# Altium PCB PCB2.PcbDoc
Units mm, origin at the board's own origin, x right, y up, seen from the top; angles counter-clockwise.
Board outline 15 x 55 mm, 2 copper layers (Top Layer, Bottom Layer); 1 components, 4 nets, 4 pads, 8 vias.
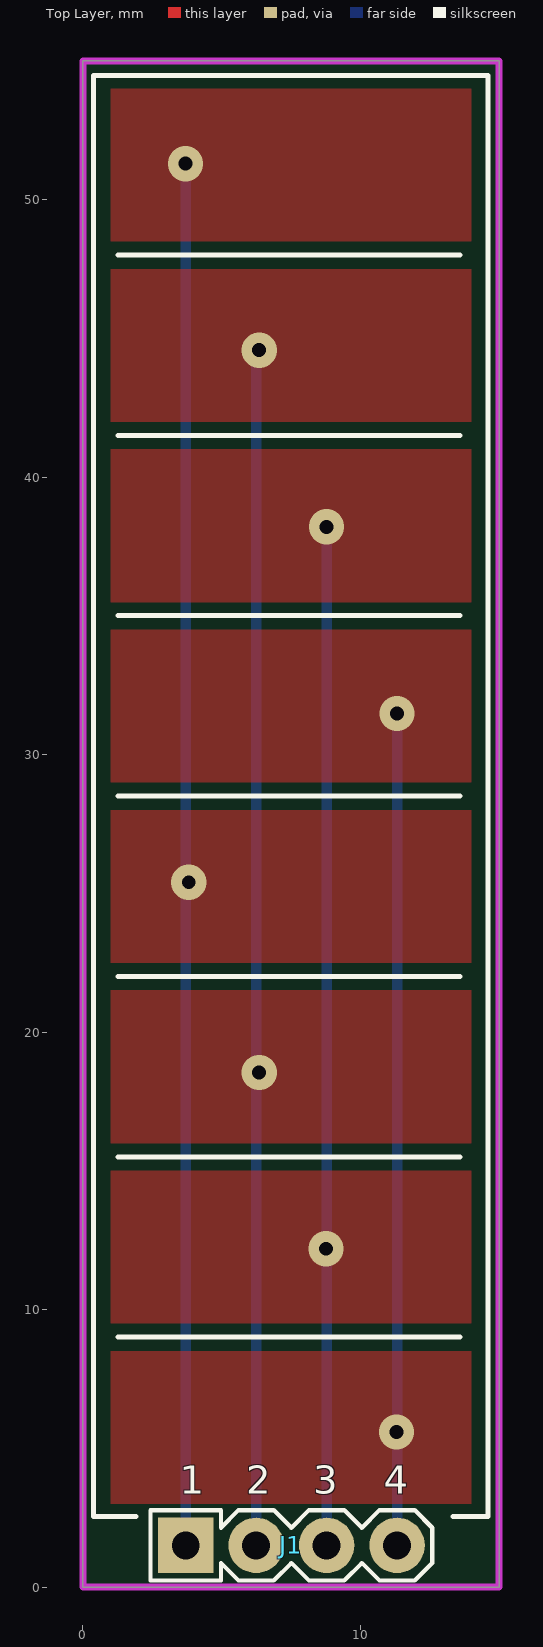
[diagram p0: Top Layer view]
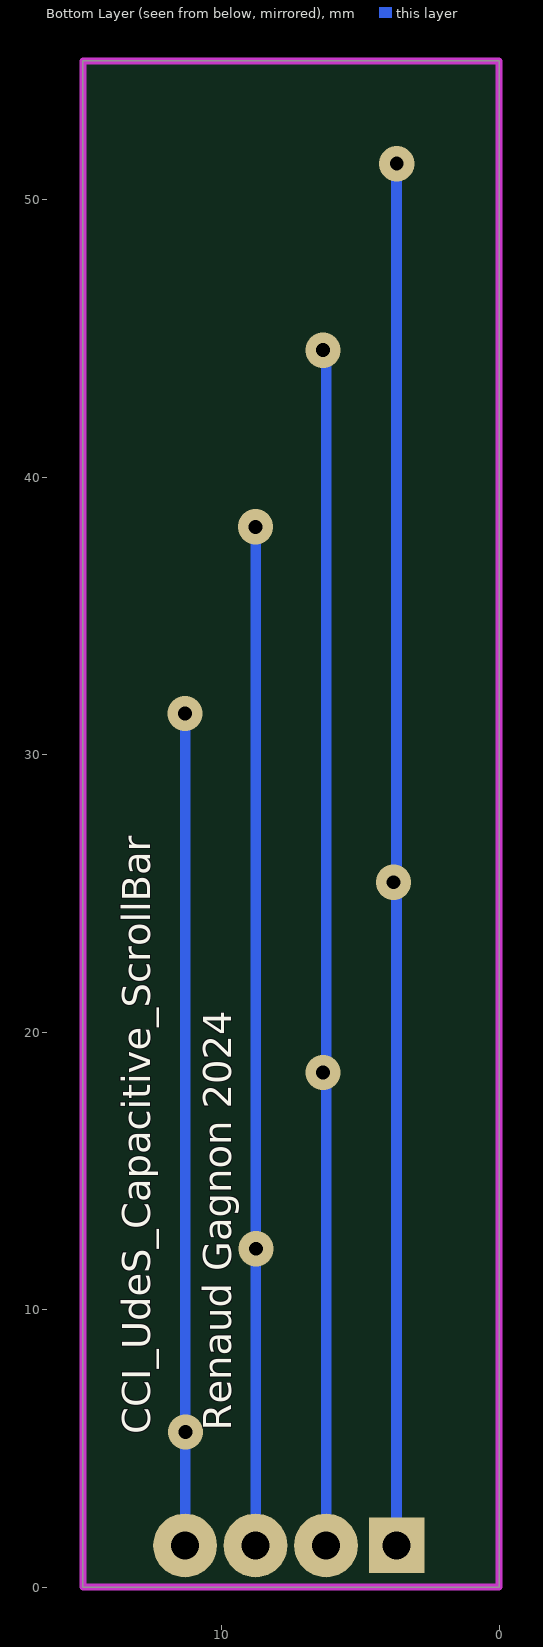
[diagram p1: Bottom Layer view, seen from below]

## Layer stack, top to bottom
Top Solder: solder mask 0.0102, Solder Resist, Dk 3.5
Top Layer: signal copper 0.0356
Dielectric 1: dielectric 0.32, FR-4, Dk 4.8
Bottom Layer: signal copper 0.0356
Bottom Solder: solder mask 0.0102, Solder Resist, Dk 3.5

## Board outline
0,0 0,55 15,55 15,0

## Design rules (kind name [scope] priority, off if disabled: settings)
Clearance Clearance_23P [InNet('USB2D_P') vs InNet('USBD_P')] p1: gap=0 ignorepadtopadclearanceinfootprint=FALSE
Clearance Clearance_13P [InNet('USBD_P') vs InNet('USB1D_P')] p2: gap=0 ignorepadtopadclearanceinfootprint=FALSE
Clearance Clearance_23N [InNet('USB2D_N') vs InNet('USBD_N')] p3: gap=0 ignorepadtopadclearanceinfootprint=FALSE
Clearance Clearance_13N [InNet('USB1D_N') vs InNet('USBD_N')] p4: gap=0 ignorepadtopadclearanceinfootprint=FALSE
Clearance Clearance_12P [InNet('USB1D_P') vs InNet('USB2D_P')] p5: gap=0 ignorepadtopadclearanceinfootprint=FALSE
Clearance Clearance_12N [InNet('USB1D_N') vs InNet('USB2D_N')] p6: gap=0 ignorepadtopadclearanceinfootprint=FALSE
Clearance [All] p7: gap=0.254 ignorepadtopadclearanceinfootprint=FALSE except(0: Arc-Hole Track-Hole SMDPad-Hole THPad-Hole Via-Hole Fill-Hole Poly-Hole Region-Hole Text-Hole; 0.2: Arc-Arc Arc-Track Arc-SMDPad Arc-THPad Arc-Via Track-Track Track-SMDPad Track-THPad Track-Via SMDPad-SMDPad THPad-THPad)
ComponentClearance [All] p1: gap=0.1 collisioncheckmode=3 verticalgap=0.254 showdistances=FALSE
DiffPairsRouting DiffPair_DiffPairsRouting [InDifferentialPair ('USBD')] p1: maxlimit=0.254 minlimit=0.2 mostfreqgap=0.254 toplayer_minwidth=0.2 toplayer_maxwidth=0.381 toplayer_prefwidth=0.254 bottomlayer_minwidth=0.2 bottomlayer_maxwidth=0.381 bottomlayer_prefwidth=0.254 maxuncoupledlength=12.7
DiffPairsRouting [All] p2: maxlimit=0.254 minlimit=0.2 mostfreqgap=0.254 toplayer_minwidth=0.2 toplayer_maxwidth=0.381 toplayer_prefwidth=0.254 bottomlayer_minwidth=0.2 bottomlayer_maxwidth=0.381 bottomlayer_prefwidth=0.254 maxuncoupledlength=12.7
HoleSize [All] p1: absolutevalues=TRUE maxlimit=5.08 minlimit=0.3 maxpercent=80.000 minpercent=20.000
MatchedLengths DiffPair_MatchedLengths [InDifferentialPair ('USBD')] p1: tolerance=25.4 checknetsindiffpair=FALSE checkdiffpairvsdiffpair=TRUE checkxsignals=TRUE checkothers=TRUE
MinimumSolderMaskSliver [All] p1: minsoldermaskwidth=0.127
PasteMaskExpansion PasteMaskExpansion_1 [All] p1: expansion=0
PolygonConnect [All] p1: thpad.connectstyle=Relief thpad.reliefconductorwidth=0.254 thpad.reliefentries=4 thpad.polygonreliefangle="90 Angle" thpad.airgapwidth=0.254 smdpad.connectstyle=Relief smdpad.reliefconductorwidth=0.254 smdpad.reliefentries=4 smdpad.polygonreliefangle="90 Angle" smdpad.airgapwidth=0.254 via.connectstyle=Direct via.reliefconductorwidth=0.254 via.reliefentries=4 via.polygonreliefangle="90 Angle" via.airgapwidth=0.254
RoutingVias [All] p1: holewidth=0.711 width=1.27 viastyle="Through Hole" minholewidth=0.3 minwidth=0.5 maxholewidth=0.711 maxwidth=1.27
ShortCircuit ShortCircuit_USBP [InNetClass('USBP') vs InNetClass('USBP')] p1: allowed=TRUE
ShortCircuit ShortCircuit_USBN [InNetClass('USBN') vs InNetClass('USBN')] p2: allowed=TRUE
ShortCircuit [All] p3: allowed=FALSE
SilkToSolderMaskClearance [IsPad] p1: minsilkscreentomaskgap=0 clearancetoexposedcopper=TRUE
SolderMaskExpansion [IsVia] p1: expansion=0.102 istentingtop=TRUE
Width [All] p1: maxlimit=0.381 minlimit=0.2 preferedwidth=0.2 minimp=50.000000 maximp=50.000000 favimp=50.000000
23 further rules are at their usual default settings.

## Components (designator, comment, footprint, x,y, rotation, side; value= is the part's Value field where it differs from the comment)
J1 "4 pin header" "4 pin header" 3.7,1.5 r0 top

## Footprints (in the part's own frame and the unit in brackets; to place one, negate y for a bottom-side part, rotate by r counter-clockwise, add the part's x,y. Pads: shape width x height; smd on the part's side, far side on the other; paste and mask are expansions set on the pad)
"4 pin header" [mm]
  rect 2x2 hole 1: 1(0,0)
  round 2 / inner round 2.3 / far side round 2.3 hole 1: 2(2.54,0) 3(5.08,0) 4(7.62,0)
  silkscreen extent -1.27,-1.27 8.89,1.27

## Part data
J1: library part 4PinHeader, Manufacturer="Sullins Connector Solutions", Supplier Part Number 1=S7002-ND, Part Number=4PinHeader, SCH_Comment="4 pin header", Supplier 1=Digi-Key

## Via types
v1: diameter 1.27, hole 0.5, Top Layer to Bottom Layer, tented both sides, 8 vias

## Nets (pads, with @x,y where several pads share a name; then routed paths per layer and width w, separated by ;. In a path a pad name is that pad's centre, name@x,y a point inside that pad or via, vN(x,y) a via of type N, cw(c..) or ccw(c..) an arc to the next point about the centre after c; other vN are vias at no path point)
Touch1: J1.1 | length 49.8
  Bottom Layer w0.381: v1@3.683,51.308 3.7,51.291 J1.1
  other v1: 3.81,25.4 3.692,51.3
Touch2: J1.2 | length 43.3
  Bottom Layer w0.381: v1@6.223,44.831 6.24,44.814 J1.2
  other v1: 6.35,18.542 6.35,44.577
Touch3: J1.3 | length 36.7
  Bottom Layer w0.381: v1@8.763,38.227 v1(8.78,38.21) J1.3
  other v1: 8.763,12.192
Touch4: J1.4 | length 30
  Bottom Layer w0.381: v1@11.303,31.496 v1(11.32,31.479) J1.4
  other v1: 11.303,5.588

## Polygon pours and split planes (outlines as drawn)
Touch1 on Top Layer "TOUCH1_L01_P021" (solid, pour order 21): 1,54 14,54 14,48.5 1,48.5
Touch2 on Top Layer "TOUCH2_L01_P020" (solid, pour order 20): 1,47.5 14,47.5 14,42 1,42
Touch3 on Top Layer "TOUCH3_L01_P019" (solid, pour order 19): 1,41 14,41 14,35.5 1,35.5
Touch4 on Top Layer "TOUCH4_L01_P018" (solid, pour order 18): 1,34.5 14,34.5 14,29 1,29
Touch1 on Top Layer "TOUCH1_L01_P017" (solid, pour order 17): 1,28 14,28 14,22.5 1,22.5
Touch2 on Top Layer "TOUCH2_L01_P016" (solid, pour order 16): 1,21.5 14,21.5 14,16 1,16
Touch4 on Top Layer "TOUCH4_L01_P000" (solid, pour order 0): 1,8.5 14,8.5 14,3 1,3
Touch3 on Top Layer "TOUCH3_L01_P015" (solid, pour order 15): 1,15 14,15 14,9.5 1,9.5

## Keep-outs
Keep-Out Layer:
  the board outline again, w0.254

## Silkscreen, mask and mechanical layers (free items; w line width, h text height)
Top Overlay:
  lines w0.18: 1.27,9.006 13.589,9.006 ; 1.27,15.506 13.589,15.506 ; 1.27,22.006 13.589,22.006 ; 1.27,28.506 13.589,28.506 ; 1.27,35.006 13.589,35.006 ; 1.27,41.506 13.589,41.506 ; 1.27,48.006 13.589,48.006 ; 1.905,2.54 0.381,2.54 0.381,54.483 14.605,54.483 14.605,2.54 13.335,2.54
  text "1" at 3.48,3.353 h1.02
  text "2" at 5.893,3.353 h1.02
  text "3" at 8.306,3.353 h1.02
  text "4" at 10.846,3.353 h1.02
Bottom Overlay:
  text "Renaud Gagnon 2024" at 9.66,5.639 h1.02 r270
  text "CCI_UdeS_Capacitive_ScrollBar" at 12.581,5.512 h1.02 r270